# Altium PCB РАЗВОДКА 2.PcbDoc (part 1 of 2)
Units mm, origin at the board's own origin, x right, y up, seen from the top; angles counter-clockwise.
Board outline 81.25 x 50.02 mm, 2 copper layers (Top Layer, Bottom Layer); 71 components, 46 nets, 302 pads, 66 vias.
Unrouted connection lines stored in the file: 1.
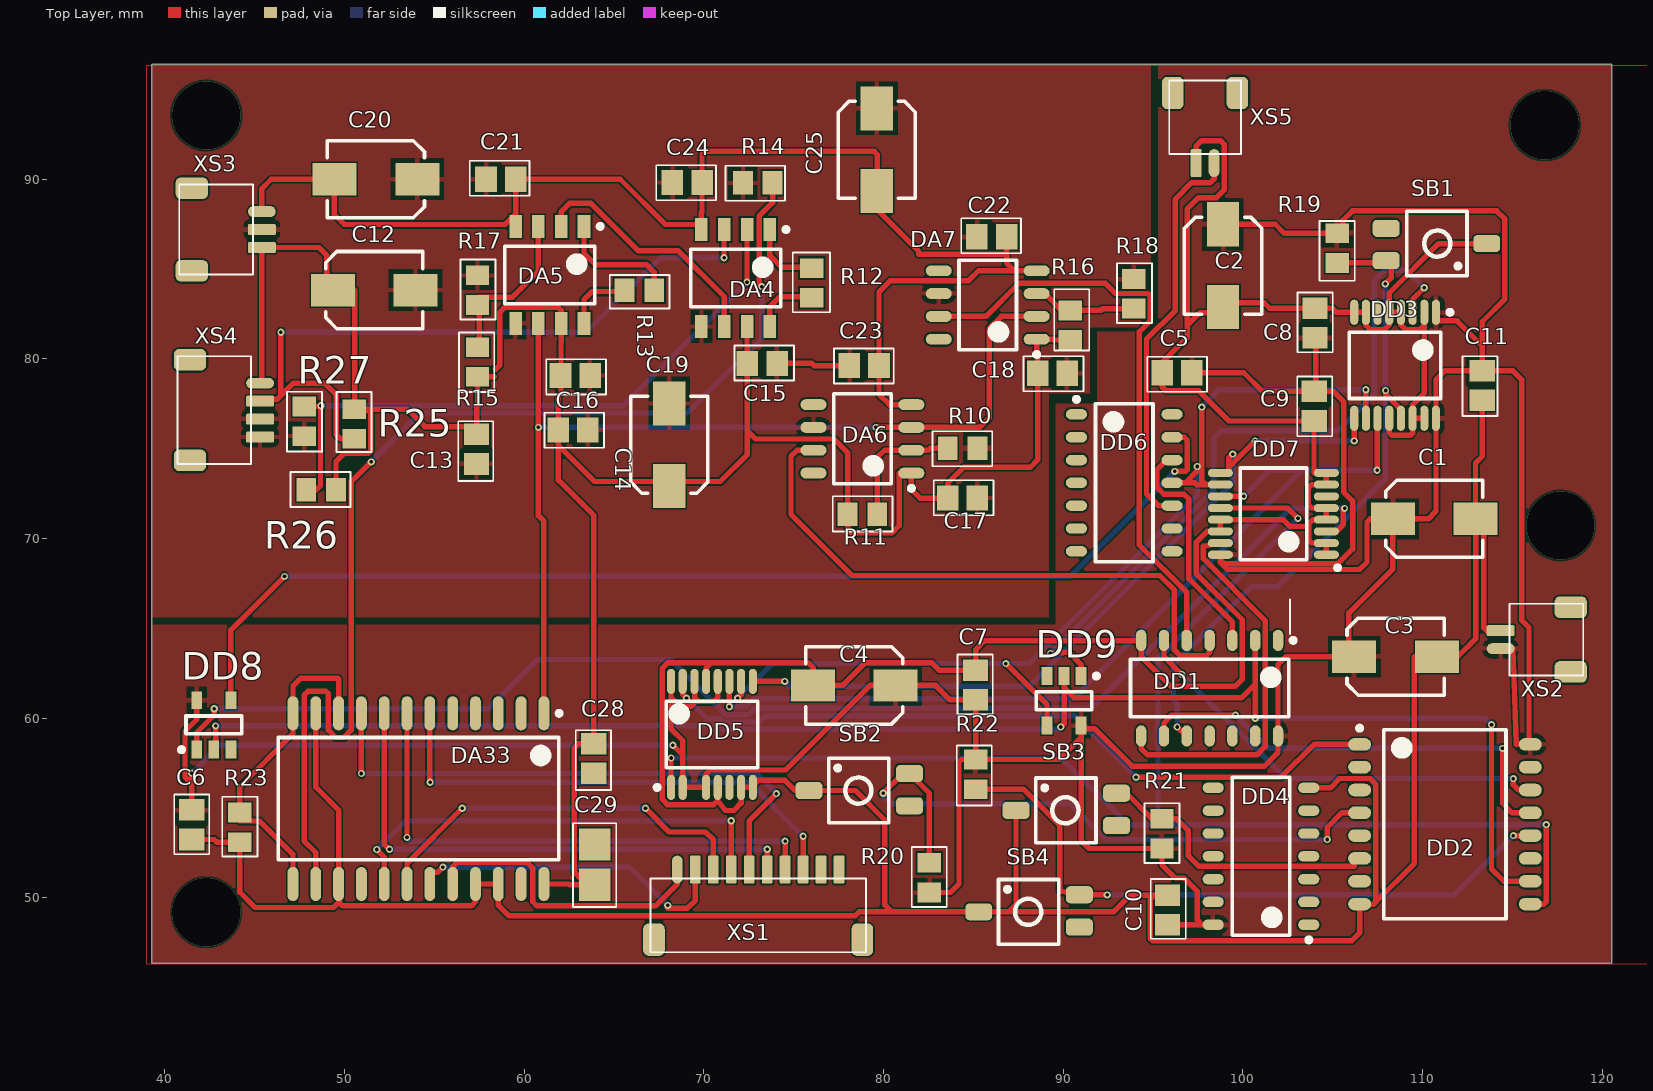
[diagram p0: Top Layer view]
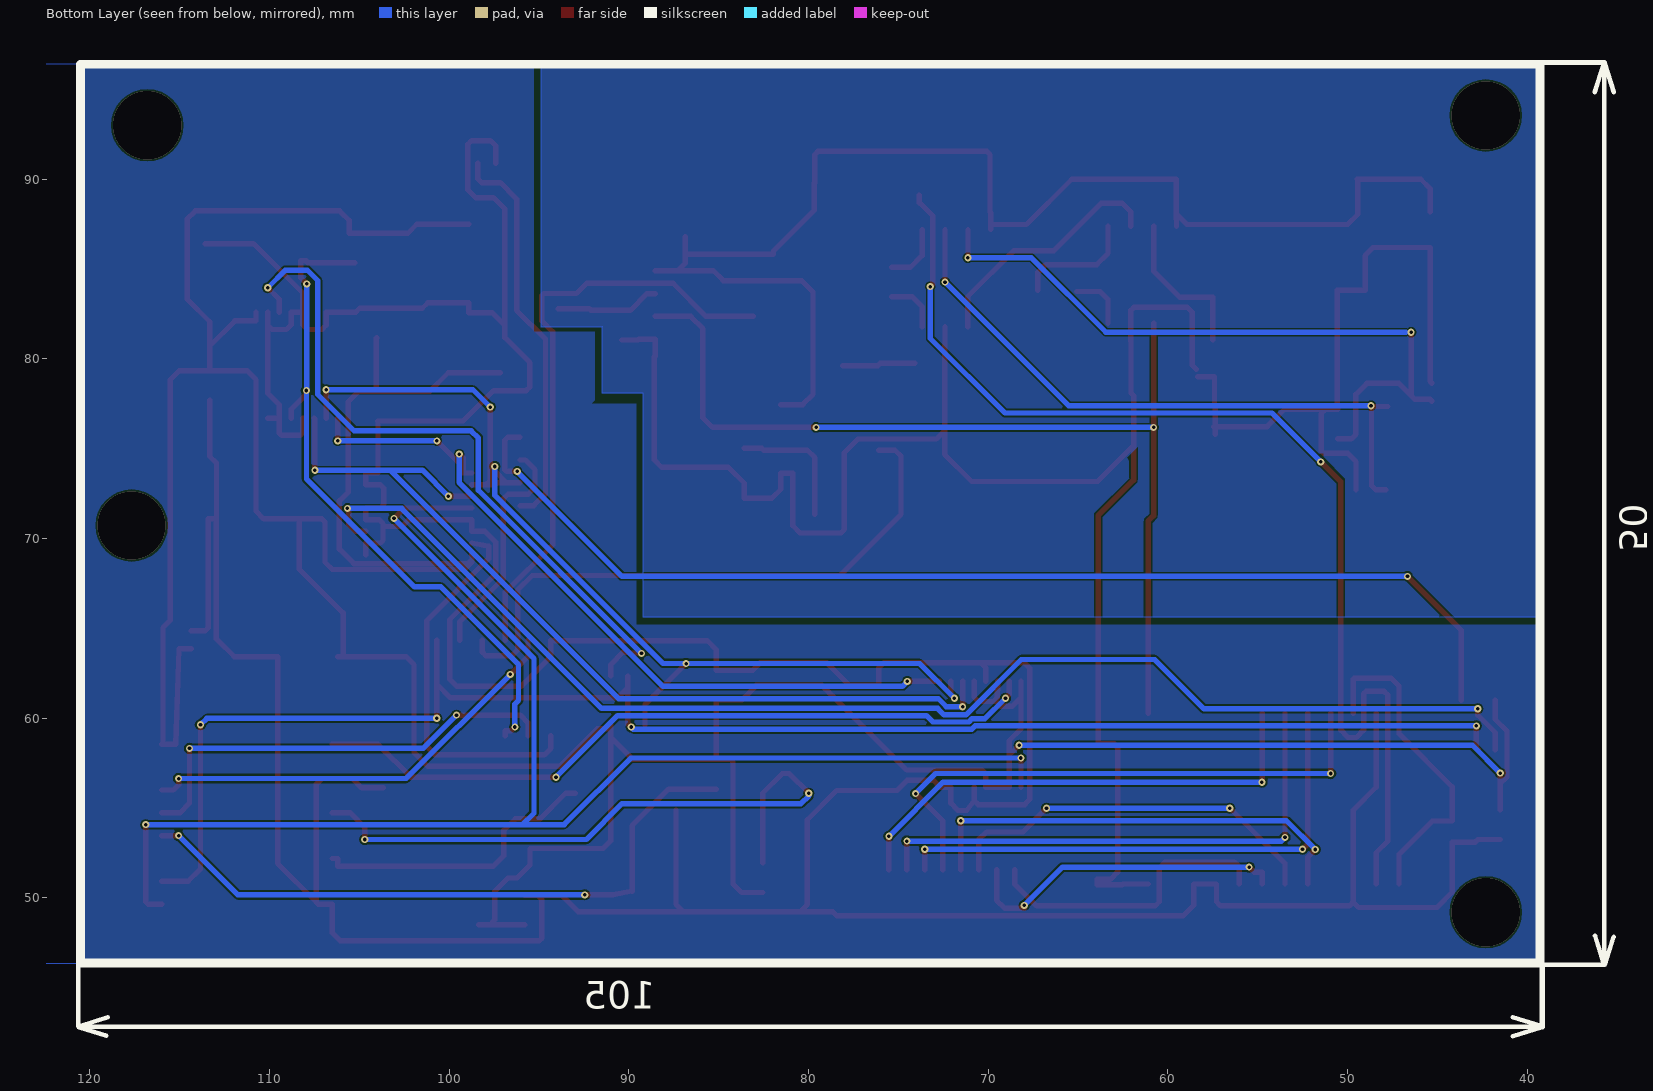
[diagram p1: Bottom Layer view, seen from below]
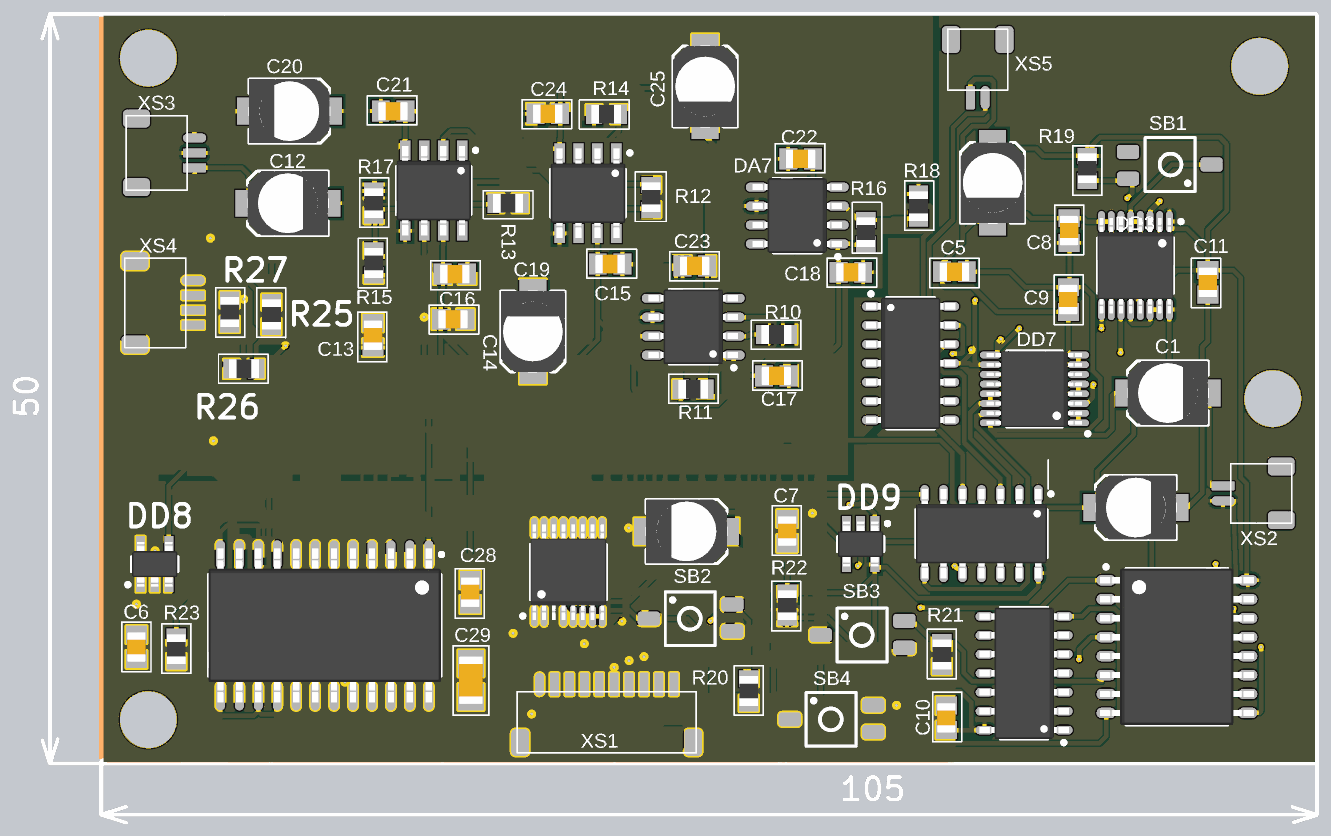
[diagram p3: 3D render of the assembled board from above, using the file's embedded part models]

## Layer stack, top to bottom
Top Solder: solder mask 0.0102, Solder Resist, Dk 3.5
Top Layer: signal copper 0.0356
Dielectric 1: dielectric 0.32, FR-4, Dk 4.8
Bottom Layer: signal copper 0.0356
Bottom Solder: solder mask 0.0102, Solder Resist, Dk 3.5

## Board outline
39.275,46.375 39.275,96.4 120.525,96.4 120.525,46.375

## Design rules (kind name [scope] priority, off if disabled: settings)
Clearance [All] p1: gap=0.1 ignorepadtopadclearanceinfootprint=FALSE except(0: Arc-Hole Track-Hole SMDPad-Hole THPad-Hole Via-Hole Fill-Hole Poly-Hole Region-Hole Text-Hole)
MinimumAnnularRing MinimumAnnularRing_1 [All] p1: minimumring=0.254
MinimumAnnularRing [All] p2: minimumring=0.254
PolygonConnect [All] p1: connectstyle=Relief reliefconductorwidth=0.254 reliefentries=4 polygonreliefangle="90 Angle" airgapwidth=0.254
RoutingVias [All] p1: holewidth=0.2 width=0.4 viastyle="Through Hole" minholewidth=0.2 minwidth=0.4 maxholewidth=0.2 maxwidth=0.4
SolderMaskExpansion [All] p1: expansion=0.102 istentingtop=FALSE
Width [All] p1: maxlimit=1 minlimit=0.1 preferedwidth=0.3
30 further rules are at their usual default settings.

## Classes and differential pairs
component class "Схема принципиальная111": C5 C6 C7 C8 C9 C10 C11 C13 C14 C15 C16 C17 C18 C21 C22 C23 C24 C28 C29 DA4 DA5 DA6 DA7 DA33 DD1 DD2 DD3 DD4 DD5 DD6 DD7 DD8 DD9 R10 R11 R12 R13 R14 R15 R16 R17 R18 R19 R20 R21 R22 R23 R25 R26 R27 SB1 SB2 SB3 SB4 XS1 XS2 XS3 XS4 XS5 С1 С2 С3 С4 С12 С19 С20 С25

## Components (designator, comment, footprint, x,y, rotation, side; value= is the part's Value field where it differs from the comment)
C5 "0.1uF" "Кер.ЧИП конд. 0.1 мкФ X7R 50В 10% 0805" 96.338,79.229 r0 top
C6 "0.1uF" "Кер.ЧИП конд. 0.1 мкФ X7R 50В 10% 0805" 41.5,54.075 r90 top
C7 "0.1uF" "Кер.ЧИП конд. 0.1 мкФ X7R 50В 10% 0805" 85.125,61.85 r270 top
C8 "0.1uF" "Кер.ЧИП конд. 0.1 мкФ X7R 50В 10% 0805" 104.025,81.994 r270 top
C9 "0.1uF" "Кер.ЧИП конд. 0.1 мкФ X7R 50В 10% 0805" 103.975,77.369 r90 top
C10 "0.1uF" "Кер.ЧИП конд. 0.1 мкФ X7R 50В 10% 0805" 95.8,49.325 r270 top
C11 "0.1uF" "Кер.ЧИП конд. 0.1 мкФ X7R 50В 10% 0805" 113.325,78.519 r90 top
C13 "0.1uF" "Кер.ЧИП конд. 0.1 мкФ X7R 50В 10% 0805" 57.354,74.975 r90 top
C14 "0.1uF" "Кер.ЧИП конд. 0.1 мкФ X7R 50В 10% 0805" 62.725,76.05 r180 top
C15 "0.1uF" "Кер.ЧИП конд. 0.1 мкФ X7R 50В 10% 0805" 73.25,79.75 r180 top
C16 "0.1uF" "Кер.ЧИП конд. 0.1 мкФ X7R 50В 10% 0805" 62.846,79.071 r180 top
C17 "0.1uF" "Кер.ЧИП конд. 0.1 мкФ X7R 50В 10% 0805" 84.4,72.25 r180 top
C18 "0.1uF" "Кер.ЧИП конд. 0.1 мкФ X7R 50В 10% 0805" 89.4,79.2 r180 top
C21 "0.1uF" "Кер.ЧИП конд. 0.1 мкФ X7R 50В 10% 0805" 58.7,90 r180 top
C22 "0.1uF" "Кер.ЧИП конд. 0.1 мкФ X7R 50В 10% 0805" 86.025,86.8 r180 top
C23 "0.1uF" "Кер.ЧИП конд. 0.1 мкФ X7R 50В 10% 0805" 78.925,79.625 r180 top
C24 "0.1uF" "Кер.ЧИП конд. 0.1 мкФ X7R 50В 10% 0805" 69.075,89.825 r180 top
C28 "0.1uF" "Кер.ЧИП конд. 0.1 мкФ X7R 50В 10% 0805" 63.875,57.75 r90 top
C29 "47uF" "Кер.ЧИП конд. 47 мкФ X5R 20% 10В 1206" 63.925,51.85 r270 top
DA4 "INA118E_BB" "AD620 Инструмент.усилитель" 71.77,84.5 r270 top
DA5 "INA118E_BB_1" "AD620 Инструмент.усилитель" 61.425,84.675 r270 top
DA6 "AD8561" AD8561 78.825,75.55 r180 top
DA7 "AD8561" AD8561 85.8,83 r180 top
DA33 "AD7824" AD7824 54.115,55.525 r270 top
DD1 "И №1 (4 компонента)" 4x2И 98.15,61.675 r270 top
DD2 "НЕ №3 (4 компонента)" CD4044B 111.25,54.1 r0 top
DD3 "Мультиплексор" Мультиплексор#1 108.475,79.644 r270 top
DD4 "И №2 (2 компонента)" 4x2И 101.01,52.315 r180 top
DD5 "Мультиплексор" Мультиплексор#2 70.45,59.1 r90 top
DD6 "3И №1" 4x2И 93.4,73.1 r0 top
DD7 "Мультиплексор" Мультиплексор#1 101.7,71.375 r180 top
DD8 "ИЛИ №1 (1 компонент)" "ОУ для источника тока" 42.725,59.625 r90 top
DD9 "ИЛИ №1 (1 компонент)" "ОУ для источника тока" 90.05,60.975 r270 top
R10 "1.5k" "0.125Вт 0805 15Ом, 5%, Чип резистор (SMD)" 84.4,75.025 r180 top
R11 "8.2k" "0.125Вт 0805 82Ом, 5%, Чип резистор (SMD)" 78.825,71.35 r180 top
R12 "200k" "0.125Вт 0805 200 кОм, 5%, Чип резистор (SMD)" 76.004,84.225 r90 top
R13 "160k" "0.125Вт 0805 160 кОм, 5%, Чип резистор (SMD)" 66.409,83.825 r0 top
R14 "51k" "0.125Вт 0805 51 кОм, 5%, Чип резистор (SMD)" 73,89.8 r0 top
R15 "7.5k" "0.125Вт 0805 75Ом, 5%, Чип резистор (SMD)" 57.404,79.825 r90 top
R16 "1k" "0.125Вт 0805 91Ом, 5%, Чип резистор (SMD)" 90.4,81.875 r90 top
R17 "2.2k" "0.125Вт 0805 22Ом, 5%, Чип резистор (SMD)" 57.404,83.825 r270 top
R18 "56" "0.125Вт 0805 5.1Ом, 5%, Чип резистор (SMD)" 93.925,83.625 r270 top
R19 "10k" "0.125Вт 0805 3 кОм, 5%, Чип резистор (SMD)" 105.25,86.169 r90 top
R20 "10k" "0.125Вт 0805 3 кОм, 5%, Чип резистор (SMD)" 82.55,51.125 r270 top
R21 "10k" "0.125Вт 0805 3 кОм, 5%, Чип резистор (SMD)" 95.5,53.575 r270 top
R22 "10k" "0.125Вт 0805 3 кОм, 5%, Чип резистор (SMD)" 85.125,56.875 r90 top
R23 "0" "0.125Вт 0805 82Ом, 5%, Чип резистор (SMD)" 44.175,53.925 r90 top
R25 "0.125Вт 0805 15Ом, 5%, Чип резистор (SMD)_2_1" "0.125Вт 0805 15Ом, 5%, Чип резистор (SMD)" 50.55,76.375 r90 top
R26 "0.125Вт 0805 15Ом, 5%, Чип резистор (SMD)_2_1" "0.125Вт 0805 15Ом, 5%, Чип резистор (SMD)" 48.7,72.725 r0 top
R27 "0.125Вт 0805 15Ом, 5%, Чип резистор (SMD)_2_1" "0.125Вт 0805 15Ом, 5%, Чип резистор (SMD)" 47.75,76.525 r90 top
SB1 "Выключатель кнопочный с замыкающим контактом" "Выключатель кнопочный ese21x" 110.825,86.419 r180 top
SB2 "Выключатель кнопочный с замыкающим контактом" "Выключатель кнопочный ese21x" 78.6,55.975 r0 top
SB3 "Выключатель кнопочный с замыкающим контактом" "Выключатель кнопочный ese21x" 90.125,54.875 r0 top
SB4 "Выключатель кнопочный с замыкающим контактом" "Выключатель кнопочный ese21x" 88.05,49.225 r0 top
XS1 "XS 10Pin" CI1108M1H 67.025,49.375 r0 top
XS2 "XS 2Pin (D)" "CI1102M1H  (F)" 116.55,62.375 r90 top
XS3 "XS 3Pin (A)" "CI1108M1H - duplicate" 43.2,89.7 r270 top
XS4 "XS Датчик" CI1102M1H 43.1,80.15 r270 top
XS5 "XS 2Pin_1" "CI1102M1H  (F)" 99.9,93.1 r180 top
ZBOAS131890726 "Comment" "BOASVIEWdrill:Таблица отверстий:0:0:0:0" 33.5,2304.45 r0 top
ZBOAS159094484 "Comment" "BOASVIEWdrilldrawing:Вид DrillDrawing:2:0:0:1" 40.4,2399.9 r0 top
ZBOAS163692688 "Comment" "BOASVIEWside:Вид платы сверху:2:0:0:0" 41.575,2354.3 r0 top
ZBOAS1866194480 "Comment" "BOASVIEWassembly:Вид спереди для сборочного:2:1:0:101" 474,2399.8 r0 top
С1 "1uF" "ECAP SMD, 1 мкФ, 50В, Конденсатор электролитический алюминиевый SMD" 110.65,71.1 r0 top
С2 "1uF" "ECAP SMD, 1 мкФ, 50В, Конденсатор электролитический алюминиевый SMD" 98.9,85.194 r270 top
С3 "1uF" "ECAP SMD, 1 мкФ, 50В, Конденсатор электролитический алюминиевый SMD" 108.5,63.425 r0 top
С4 "1uF" "ECAP SMD, 1 мкФ, 50В, Конденсатор электролитический алюминиевый SMD" 78.375,61.825 r180 top
С12 "1uF" "ECAP SMD, 1 мкФ, 50В, Конденсатор электролитический алюминиевый SMD" 51.65,83.825 r0 top
С19 "1uF" "ECAP SMD, 1 мкФ, 50В, Конденсатор электролитический алюминиевый SMD" 68.075,75.225 r90 top
С20 "1uF" "ECAP SMD, 1 мкФ, 50В, Конденсатор электролитический алюминиевый SMD" 51.75,90 r180 top
С25 "1uF" "ECAP SMD, 1 мкФ, 50В, Конденсатор электролитический алюминиевый SMD" 79.625,91.65 r270 top

## Footprints (in the part's own frame and the unit in brackets; to place one, negate y for a bottom-side part, rotate by r counter-clockwise, add the part's x,y. Pads: shape width x height; smd on the part's side, far side on the other; paste and mask are expansions set on the pad)
"0.125Вт 0805 3 кОм, 5%, Чип резистор (SMD)" [mm]
  rect 1.1x1.3 smd: 1(-0.825,0) 2(0.825,0)
  body extent -1,-0.63 1,0.63, height 0.5
"0.125Вт 0805 5.1Ом, 5%, Чип резистор (SMD)" [mm]
  rect 1.1x1.3 smd: 1(-0.825,0) 2(0.825,0)
  body extent -1,-0.63 1,0.63, height 0.5
"0.125Вт 0805 15Ом, 5%, Чип резистор (SMD)" [mm]
  rect 1.1x1.3 smd: 1(-0.825,0) 2(0.825,0)
  body extent -1,-0.63 1,0.63, height 0.5
"0.125Вт 0805 22Ом, 5%, Чип резистор (SMD)" [mm]
  rect 1.1x1.3 smd: 1(-0.825,0) 2(0.825,0)
  body extent -1,-0.63 1,0.63, height 0.5
"0.125Вт 0805 51 кОм, 5%, Чип резистор (SMD)" [mm]
  rect 1.1x1.3 smd: 1(-0.825,0) 2(0.825,0)
  body extent -1,-0.63 1,0.63, height 0.5
"0.125Вт 0805 75Ом, 5%, Чип резистор (SMD)" [mm]
  rect 1.1x1.3 smd: 1(-0.825,0) 2(0.825,0)
  body extent -1,-0.63 1,0.63, height 0.5
"0.125Вт 0805 82Ом, 5%, Чип резистор (SMD)" [mm]
  rect 1.1x1.3 smd: 1(-0.825,0) 2(0.825,0)
  body extent -1,-0.63 1,0.63, height 0.5
"0.125Вт 0805 91Ом, 5%, Чип резистор (SMD)" [mm]
  rect 1.1x1.3 smd: 1(-0.825,0) 2(0.825,0)
  body extent -1,-0.63 1,0.63, height 0.5
"0.125Вт 0805 160 кОм, 5%, Чип резистор (SMD)" [mm]
  rect 1.1x1.3 smd: 1(-0.825,0) 2(0.825,0)
  body extent -1,-0.63 1,0.63, height 0.5
"0.125Вт 0805 200 кОм, 5%, Чип резистор (SMD)" [mm]
  rect 1.1x1.3 smd: 1(-0.825,0) 2(0.825,0)
  body extent -1,-0.63 1,0.63, height 0.5
4x2И [mm] "MC74ACT08DG, Логический элемент И, 74ACT08, 2 входа, 24мА, 4.5В до 5.5В, SOIC-14"
  oval 1.18x0.58 smd: 1(-2.66,3.81) 2(-2.66,2.54) 3(-2.66,1.27) 4(-2.66,0) 5(-2.66,-1.27) 6(-2.66,-2.54) 7(-2.66,-3.81) 8(2.66,-3.81) 9(2.66,-2.54) 10(2.66,-1.27) 11(2.66,0) 12(2.66,1.27) 13(2.66,2.54) 14(2.66,3.81)
  silkscreen extent -2.78,-4.4 1.6,4.78, body extent -3,-4.4 3,4.4, height 1.75
"AD620 Инструмент.усилитель" [mm] "SOIC, 8-Leads, Body 4,90x3,90mm, Pitch 1,27mm, IPC Medium Density"
  rect 1.28x0.7 smd: 1(-2.7,1.905) 2(-2.7,0.635) 3(-2.7,-0.635) 4(-2.7,-1.905) 5(2.7,-1.905) 6(2.7,-0.635) 7(2.7,0.635) 8(2.7,1.905)
  silkscreen extent -2.82,-2.5 1.6,2.93, body extent -3,-2.5 3,2.5, height 1.75
AD7824 [mm] "SOIC, 24-Leads, Body 15,40x7,50mm, Pitch 1,27mm, IPC Medium Density"
  oval 1.9x0.6 smd: 1(-4.75,6.985) 2(-4.75,5.715) 3(-4.75,4.445) 4(-4.75,3.175) 5(-4.75,1.905) 6(-4.75,0.635) 7(-4.75,-0.635) 8(-4.75,-1.905) 9(-4.75,-3.175) 10(-4.75,-4.445) 11(-4.75,-5.715) 12(-4.75,-6.985) 13(4.75,-6.985) 14(4.75,-5.715) 15(4.75,-4.445) 16(4.75,-3.175) 17(4.75,-1.905) 18(4.75,-0.635) 19(4.75,0.635) 20(4.75,1.905) 21(4.75,3.175) 22(4.75,4.445) 23(4.75,5.715) 24(4.75,6.985)
  silkscreen extent -4.87,-7.8 3.4,7.96, body extent -5.16,-7.8 5.16,7.8, height 2.65
AD8561 [mm] "SOIC, 8-Leads, Body 4,90x3,90mm, Pitch 1,27mm, IPC Medium Density"
  oval 1.45x0.6 smd: 1(-2.725,1.905) 2(-2.725,0.635) 3(-2.725,-0.635) 4(-2.725,-1.905) 5(2.725,-1.905) 6(2.725,-0.635) 7(2.725,0.635) 8(2.725,1.905)
  silkscreen extent -2.85,-2.5 1.6,2.88, body extent -3,-2.5 3,2.5, height 1.75
"BOASVIEWassembly:Вид спереди для сборочного:2:1:0:101" [mm]
"BOASVIEWdrill:Таблица отверстий:0:0:0:0" [mm]
"BOASVIEWdrilldrawing:Вид DrillDrawing:2:0:0:1" [mm]
"BOASVIEWside:Вид платы сверху:2:0:0:0" [mm]
CD4044B [mm] "SOIC, 16-Leads, Body 10,30x7,50mm, Pitch 1,27mm, IPC Medium Density"
  oval 1.28x0.7 smd: 1(-4.75,4.445) 2(-4.75,3.175) 3(-4.75,1.905) 4(-4.75,0.635) 5(-4.75,-0.635) 6(-4.75,-1.905) 7(-4.75,-3.175) 8(-4.75,-4.445) 9(4.75,-4.445) 10(4.75,-3.175) 11(4.75,-1.905) 12(4.75,-0.635) 13(4.75,0.635) 14(4.75,1.905) 15(4.75,3.175) 16(4.75,4.445)
  silkscreen extent -4.87,-5.25 3.4,5.47, body extent -5.16,-5.25 5.16,5.25, height 2.65
CI1102M1H [mm]
  oval 0.6x1.55 smd: 1(1.5,2.2)
  rrect20% 0.6x1.55 smd: 2(2.5,2.2) 3(3.5,2.2) 4(4.5,2.2)
  rrect50% 1.2x1.8 smd: 5(0.2,-1.7) 6(5.8,-1.7)
  silkscreen extent 0,-2.4 6,1.7
"CI1102M1H  (F)" [mm]
  oval 0.6x1.55 smd: 1(1.5,2.2)
  rrect20% 0.6x1.55 smd: 2(2.5,2.2)
  rrect50% 1.2x1.8 smd: 3(0.2,-1.7) 4(3.8,-1.7)
  silkscreen extent 0,-2.4 4,1.7
CI1108M1H [mm]
  oval 0.6x1.55 smd: 1(1.5,2.2)
  rrect20% 0.6x1.55 smd: 2(2.5,2.2) 3(3.5,2.2) 4(4.5,2.2) 5(5.5,2.2) 6(6.5,2.2) 7(7.5,2.2) 8(8.5,2.2) 9(9.5,2.2) 10(10.5,2.2)
  rrect50% 1.2x1.8 smd: 11(0.2,-1.7) 12(11.8,-1.7)
  silkscreen extent 0,-2.4 12,1.7
"CI1108M1H - duplicate" [mm]
  rrect20% 0.6x1.55 smd: 1(3.5,2.2) 2(2.5,2.2)
  oval 0.6x1.55 smd: 3(1.5,2.2)
  rrect50% 1.2x1.8 smd: 4(0.2,-1.7) 5(4.8,-1.7)
  silkscreen extent 0,-2.4 5,1.7
"ECAP SMD, 1 мкФ, 50В, Конденсатор электролитический алюминиевый SMD" [mm] "ECAP SMD, 1 мкФ, 50В, Конденсатор электролитический алюминиевый SMD"
  rect 2.45x1.8 smd: 1(-2.3,0) 2(2.3,0)
  silkscreen extent -2.7,-2.15 2.7,2.15, body extent -2.75,-2.15 2.75,2.15, height 5.4
"Выключатель кнопочный ese21x" [mm] "SOTFL, 3-Leads, Body 3,62x1,60mm, Pitch 1,50mm, IPC Medium Density"
  rrect50% 1.5x0.95 smd: 1(-2.75,0) 2(2.85,0.95) 3(2.85,-0.85)
  silkscreen extent -1.65,-1.8 1.7,1.8
"Кер.ЧИП конд. 0.1 мкФ X7R 50В 10% 0805" [mm]
  rect 1.2x1.4 smd: 1(-0.825,0) 2(0.825,0)
  body extent -1,-0.63 1,0.63, height 1.3
"Кер.ЧИП конд. 47 мкФ X5R 20% 10В 1206" [mm] "Кер.ЧИП конд. 47 мкФ X5R 20% 10В 1206"
  rect 1.8x1.75 smd: 1(-1.125,0) 2(1.125,0)
  body extent -1.6,-0.8 1.6,0.8, height 1.5
Мультиплексор#1 [mm] "TSOP, 16-Leads, Body 5,00x4,40mm, Pitch 0,65mm, IPC Medium Density"
  oval 1.4x0.45 smd: 1(-2.95,2.275) 2(-2.95,1.625) 3(-2.95,0.975) 4(-2.95,0.325) 5(-2.95,-0.325) 6(-2.95,-0.975) 7(-2.95,-1.625) 8(-2.95,-2.275) 9(2.95,-2.275) 10(2.95,-1.625) 11(2.95,-0.975) 12(2.95,-0.325) 13(2.95,0.325) 14(2.95,0.975) 15(2.95,1.625) 16(2.95,2.275)
  silkscreen extent -3.07,-2.55 1.85,3.17, body extent -3.2,-2.55 3.2,2.55, height 0.95
Мультиплексор#2 [mm] "TSOP, 16-Leads, Body 5,00x4,40mm, Pitch 0,65mm, IPC Medium Density"
  oval 1.4x0.45 smd: 1(-2.95,2.275) 2(-2.95,1.625) 4(-2.95,0.325) 5(-2.95,-0.325) 6(-2.95,-0.975) 7(-2.95,-1.625) 8(-2.95,-2.275) 9(2.95,-2.275) 10(2.95,-1.625) 11(2.95,-0.975) 12(2.95,-0.325) 13(2.95,0.325) 14(2.95,0.975) 15(2.95,1.625) 16(2.95,2.275)
  silkscreen extent -3.07,-2.55 1.85,3.17, body extent -3.2,-2.55 3.2,2.55, height 0.95
"ОУ для источника тока" [mm] "SOT23, 5-Leads, Body 2,90x2,80mm, Pitch 0,95mm, IPC Medium Density"
  rect 1x0.6 smd: 1(-1.375,0.95) 2(-1.375,0) 3(-1.375,-0.95) 4(1.375,-0.95) 5(1.375,0.95)
  silkscreen extent -1.5,-1.55 0.5,1.92, body extent -1.5,-1.53 1.5,1.53, height 1.45

## Part data
C5 C6 C7 C8 C9 C10 C11 C13 C14 C15 C16 C17 C18 C21 C22 C23 C24 C28: library part "Кер.ЧИП конд. 0.1 мкФ X7R 50В 10% 0805", "Кер.ЧИП конд. 0.1 мкФ X7R 50В 10% 0805"
C29: library part "Кер.ЧИП конд. 47 мкФ X5R 20% 10В 1206", "Кер.ЧИП конд. 47 мкФ X5R 20% 10В 1206"
DD3 DD5 DD7: "74HC40510"
R10: library part "0.125Вт 0805 15Ом, 5%, Чип резистор (SMD)_2_1", "0.125Вт 0805 15Ом, 5%, Чип резистор (SMD)"
R11 R23: library part "0.125Вт 0805 82Ом, 5%, Чип резистор (SMD)_2_2", "0.125Вт 0805 82Ом, 5%, Чип резистор (SMD)"
R12: library part "0.125Вт 0805 200 кОм, 5%, Чип резистор (SMD)", "0.125Вт 0805 200 кОм, 5%, Чип резистор (SMD)"
R13: library part "0.125Вт 0805 160 кОм, 5%, Чип резистор (SMD)", "0.125Вт 0805 160 кОм, 5%, Чип резистор (SMD)"
R14: library part "0.125Вт 0805 51 кОм, 5%, Чип резистор (SMD)", "0.125Вт 0805 51 кОм, 5%, Чип резистор (SMD)"
R15: library part "0.125Вт 0805 75Ом, 5%, Чип резистор (SMD)", "0.125Вт 0805 75Ом, 5%, Чип резистор (SMD)"
R16: library part "0.125Вт 0805 91кОм, 5%, Чип резистор (SMD)_1", "0.125Вт 0805 91Ом, 5%, Чип резистор (SMD)"
R17: library part "0.125Вт 0805 22Ом, 5%, Чип резистор (SMD)", "0.125Вт 0805 22Ом, 5%, Чип резистор (SMD)"
R18: library part "0.125Вт 0805 5.1Ом, 5%, Чип резистор (SMD)_2", "0.125Вт 0805 5.1Ом, 5%, Чип резистор (SMD)"
R19 R20 R21 R22: library part "0.125Вт 0805 5кОм, 5%, Чип резистор (SMD)", "0.125Вт 0805 5кОм, 5%, Чип резистор (SMD)"
R25 R26 R27: "0.125Вт 0805 15Ом, 5%, Чип резистор (SMD)"
С1 С2 С3 С4 С12 С19 С20 С25: library part "ECAP SMD, 1 мкФ, 50В, Конденсатор электролитический алюминиевый SMD", "ECAP SMD, 1 мкФ, 50В, Конденсатор электролитический алюминиевый SMD"

## Via types
v1: diameter 0.4, hole 0.2, Top Layer to Bottom Layer, 62 vias
v2: diameter 3.8, hole 3.8, Top Layer to Bottom Layer, 4 vias

## Nets (pads, with @x,y where several pads share a name; then routed paths per layer and width w, separated by ;. In a path a pad name is that pad's centre, name@x,y a point inside that pad or via, vN(x,y) a via of type N, cw(c..) or ccw(c..) an arc to the next point about the centre after c; other vN are vias at no path point)
"+5V A": C13.2 C14.2 C15.2 C16.2 C17.2 C18.2 C28.2 C29.2 DA4.7 DA5.7 DA6.1 DA7.1 DA33.24 R11.2 R15.1 R16.1 R25.2 R26.2 XS3.1 XS4.1 С12.1 С19.1 | length 137.9
  Top Layer w0.3: XS4.1@45.3,78.65 45.4,78.75 XS3.1@45.4,86.2 48.572,86.2 49.022,85.75 49.022,83.825 С12.1@49.35,83.825 50.571,83.825 R25.2@50.571,77.2 ; R26.2@49.525,72.725 49.525,74.288 49.987,74.75 51.331,74.75 51.46,74.879 51.46,76.946 51.206,77.2 ; R25.2@50.55,77.2 R25.2@50.571,77.2 ; C13.2@57.354,75.8 57.354,77.35 57.404,77.4 R15.1@57.404,79 58.323,79 ; C13.2@57.45,76.225 54.467,76.225 53.492,77.2 51.206,77.2 ; 58.419,79.425 58.649,79.654 58.649,82.601 58.928,82.88 61.882,82.88 62.06,82.702 DA5.7@62.06,81.975 62.06,80.985 62.05,80.975 62.05,80.025 62.05,78.103 61.9,77.953 C14.2@61.9,76.05 61.9,75.184 ; DA33.24@61.1,50.775 62.484,50.775 62.534,50.725 C29.2@63.925,50.725 63.925,51.029 63.195,51.029 62.789,51.435 62.789,58.372 62.992,58.575 C28.2@63.875,58.575 63.875,71.279 61.9,73.254 61.9,75.184 ; DA4.7@72.405,81.8 72.405,80.767 72.425,80.747 C15.2@72.425,79.75 72.425,75.997 ; DA6.1@81.55,73.645 DA6.1@81.534,73.645 ; R16.1@90.4,81.05 89.478,81.05 89.433,81.095 DA7.1@88.525,81.095 88.525,80.162 88.575,80.112 C18.2@88.575,79.2 88.575,74.371 88.169,73.965 84.455,73.965 83.575,73.085 C17.2@83.575,72.25 82.03,72.25 81.534,72.746 DA6.1@81.534,73.645 ; R25.2@50.571,77.2 51.206,77.2 ; 61.9,75.184 63.909,73.175 68.075,73.175 70.914,73.175 72.425,74.686 72.425,75.997 ; 72.425,75.997 72.882,75.54 77.238,75.54 78,74.778 R11.2@78,71.35 78,70.51 78.203,70.307 80.467,70.307 80.874,70.714 80.874,73.645 DA6.1@81.534,73.645
"+5V D": C5.2 C6.2 C7.2 C8.2 C9.2 C10.2 C11.2 DD1.14 DD2.16 DD3.1 DD3.16 DD4.14 DD5.2 DD5.4 DD5.12 DD5.14 DD5.16 DD7.16 DD8.5 DD9.5 R19.2 R20.2 R21.2 R22.2 XS2.1 С1.1 С2.1 С3.1 С4.1 | length 247.6
  Top Layer w0.3: C6.2@41.5,54.9 41.5,56.363 ; v1(41.5,56.947) 41.5,56.363 ; DD8.5@41.775,61 41.775,59.936 41.123,59.284 41.123,56.74 41.5,56.363 ; DD5.16@68.175,62.05 68.175,61.162 ; v1(68.275,58.496) 68.825,57.946 ; DD5.14@69.475,62.05 69.475,61.564 69.497,61.564 69.497,61.131 69.628,61 ; DD5.12@70.775,62.05 70.775,61.163 70.542,60.93 69.698,60.93 69.628,61 ; R20.2@82.55,50.3 83.718,50.3 84.201,50.783 84.201,57.573 84.328,57.7 R22.2@85.125,57.7 ; DD9.5@91,59.6 DD9.5@91,59.411 ; C10.2@95.8,48.5 97.053,48.5 97.058,48.505 97.732,48.505 ; C5.2@97.163,79.229 100.051,79.229 101.086,78.194 C9.2@103.975,78.194 ; DD4.14@98.35,48.505 97.732,48.505 ; DD7.16@98.75,69.1 98.73,69.1 98.73,68.834 ; С2.1@98.9,87.494 101.803,87.494 102.303,86.994 R19.2@105.25,86.994 105.562,86.994 105.562,87.706 106.096,88.24 114.122,88.24 114.579,87.782 114.579,83.322 113.325,82.067 113.325,80.721 ; C8.2@104.025,81.169 104.052,81.142 104.052,78.271 C9.2@103.975,78.194 ; С3.1@106.2,63.425 С3.1@105.9,63.425 ; DD3.1@110.75,82.594 110.75,82.118 111.928,82.118 113.325,80.721 ; XS2.1@114.35,63.875 115.037,63.875 115.214,58.545 DD2.16@115.926,58.545 ; DD2.16@116,58.545 DD2.16@115.926,58.545 ; 68.175,61.162 68.175,59.4 68.825,58.75 68.825,57.946 ; 68.175,61.162 68.674,60.662 69.291,60.662 69.628,61 ; 68.825,57.946 DD5.2@68.825,56.15 DD5.4@70.125,56.15 70.125,56.896 70.349,57.12 74.543,57.12 79.248,61.825 С4.1@80.675,61.825 82.904,61.825 83.704,61.025 C7.2@85.125,61.025 R22.2@85.125,57.7 ; R22.2@85.125,57.7 89.772,57.7 91,58.928 ; 91,58.928 DD9.5@91,59.411 ; 91,58.928 91,53.19 91.44,52.75 R21.2@95.5,52.75 95.5,51.841 96.237,51.105 96.723,51.105 97.469,50.359 97.469,48.768 97.732,48.505 ; DD9.5@91,59.411 91.77,59.411 93.853,57.328 101.194,57.328 101.96,58.094 DD1.14@101.96,59.015 101.96,62.992 102.393,63.425 С3.1@105.9,63.425 ; 98.73,68.834 98.806,68.758 98.958,68.605 105.308,68.605 106.114,69.411 106.114,72.094 105.613,72.595 105.613,77.622 105.041,78.194 C9.2@103.975,78.194 ; 98.73,68.834 98.73,68.682 98.882,68.529 99.136,68.275 106.502,68.275 106.909,68.682 106.909,70.922 107.086,71.1 С1.1@108.35,71.1 ; С3.1@105.9,63.425 105.9,65.867 108.35,68.317 С1.1@108.35,71.1 ; С1.1@108.35,71.1 110.324,71.1 110.75,71.526 DD3.16@110.75,76.694 110.75,78.842 111.253,79.344 C11.2@113.325,79.344 ; C11.2@113.325,79.344 115.017,79.344 115.519,78.842 115.519,65.456 115.926,65.049 DD2.16@115.926,58.545 ; C11.2@113.325,79.344 113.325,80.721
  Bottom Layer w0.3: v1(41.5,56.947) 43.049,58.496 v1(68.275,58.496)
"-5V A": C21.1 C22.1 C23.1 C24.1 DA4.4 DA5.4 DA6.4 DA7.4 XS3.3 С20.2 С25.2 | length 76.7
  Top Layer w0.3: XS3.3@45.4,88.2 45.39,88.2 45.39,89.467 45.923,90 С20.2@49.428,90 ; С20.2@49.45,90 С20.2@49.428,90 ; DA5.4@59.52,87.375 59.525,88.075 ; DA4.4@69.865,87.2 DA4.4@69.865,87.478 ; С25.2@79.65,89.775 79.65,91.374 79.474,91.55 70.076,91.55 69.9,91.374 69.9,88.173 69.865,88.138 DA4.4@69.865,87.478 ; С25.2@79.674,89.775 79.674,88.276 81.948,86.002 81.948,85.827 86.723,85.827 86.85,85.954 ; DA6.4@81.55,77.455 80.324,77.455 79.75,78.029 C23.1@79.75,79.625 79.75,83.718 80.385,84.353 84.742,84.353 85.293,84.905 87.289,84.905 ; C22.1@86.85,86.8 86.85,85.954 ; DA7.4@88.525,84.905 87.289,84.905 ; С20.2@49.428,90 49.428,88.036 49.987,87.478 58.928,87.478 59.318,87.867 59.525,88.075 ; 59.525,88.075 C21.1@59.525,90 65.346,90 67.869,87.478 DA4.4@69.865,87.478 ; 86.85,85.954 86.85,85.827 86.85,85.344 87.289,84.905
A: C13.1 C14.1 C15.1 C16.1 C17.1 C18.1 C21.2 C22.2 C23.2 C24.2 C28.1 C29.1 DA4.5 DA5.5 DA6.6 DA7.6 DA33.10 DA33.12 DA33.13 DA33.16 R10.1 R14.1 R17.1 R18.1 R23.2 R27.1 XS1.9 XS1.10 XS3.2 XS4.3 XS4.4 С12.2 С19.2 С20.1 С25.1 | length 22.8
  Top Layer w0.3: DA33.13@47.13,50.775 47.13,52.426 45.276,54.28 44.175,54.28 R23.2@44.175,54.75 44.175,56.185 47.13,59.14 DA33.12@47.13,60.275 47.13,61.799 47.549,62.218 49.632,62.218 49.67,62.179 DA33.10@49.67,60.275 ; C15.1@74.075,79.75 76.022,79.75 76.147,79.625 C23.2@78.1,79.625
D: C5.1 C6.1 C7.1 C8.1 C9.1 C10.1 C11.1 DA33.11 DA33.15 DA33.21 DA33.22 DD1.7 DD2.8 DD3.2 DD3.4 DD3.5 DD3.7 DD3.8 DD3.12 DD3.14 DD3.15 DD4.7 DD5.5 DD5.7 DD5.8 DD5.13 DD7.1 DD7.2 DD7.4 DD7.5 DD7.7 DD7.8 DD7.13 DD7.14 R23.1 SB1.1 SB2.1 SB3.1 SB4.1 XS2.2 XS5.2 С1.2 С2.2 С3.2 С4.2 | length 301.8
  Top Layer w0.3: C6.1@41.5,53.25 42.748,53.25 42.898,53.1 R23.1@44.175,53.1 44.175,50.313 45.021,49.467 49.378,49.467 49.682,49.772 ; DA33.11@48.4,60.275 48.4,56.159 49.67,54.889 DA33.15@49.67,50.775 ; DD5.13@70.125,62.05 70.125,62.789 70.43,63.094 ; DD5.5@70.775,56.15 70.775,55.423 ; С4.2@76.075,61.825 С4.2@76.098,61.825 ; SB3.1@87.375,54.875 87.376,49.631 86.97,49.225 ; DD1.7@94.34,64.335 DD1.7@94.34,64.313 ; C10.1@95.8,50.15 95.098,50.15 ; XS5.2@97.4,90.9 97.4,91.846 97.705,92.151 98.755,92.151 98.958,91.948 98.958,89.408 98.527,88.976 97.536,88.976 96.901,88.341 96.901,81.864 ; DD4.7@103.67,56.125 104.877,56.125 105.394,56.642 107.086,56.642 107.391,56.337 107.391,49.757 ; C9.1@103.975,76.544 C9.1@103.962,76.544 ; DD7.1@104.65,69.1 DD7.2@104.65,69.75 103.834,69.75 103.683,69.901 103.683,70.67 ; DD2.8@106.5,49.655 DD2.8@106.502,49.655 ; DD3.12@108.15,76.694 108.15,75.895 108.302,75.743 109.322,75.743 109.45,75.871 DD3.14@109.45,76.694 ; DD3.15@110.1,76.694 DD3.14@109.45,76.694 ; DD3.2@110.1,82.594 110.1,81.89 ; C11.1@113.325,77.694 113.325,74.568 112.95,74.193 С1.2@112.95,71.1 С1.2@112.954,71.1 ; SB1.1@113.575,86.419 110.902,86.419 108.15,83.668 DD3.5@108.15,82.594 ; XS2.2@114.35,64.875 113.56,64.875 113.411,65.024 113.411,71.1 С1.2@112.954,71.1 ; DA33.15@49.67,50.775 49.682,49.772 ; DA33.15@49.67,50.775 49.67,49.784 49.682,49.772 ; 49.682,49.772 49.899,49.555 57.061,49.555 57.29,49.784 DA33.21@57.29,50.775 DA33.22@58.56,50.775 58.56,49.581 59.144,48.997 78.41,48.997 78.638,49.225 80.467,49.225 ; 70.43,63.094 75.794,63.094 76.098,62.789 С4.2@76.098,61.825 ; 70.43,63.094 67.996,63.094 67.691,62.789 67.691,55.474 67.97,55.194 70.546,55.194 70.775,55.423 ; 70.775,55.423 71.181,54.864 71.669,54.864 72.075,55.27 DD5.7@72.075,56.15 DD5.8@72.725,56.15 72.725,56.223 73.056,56.554 74.5,56.554 75.079,55.975 SB2.1@75.85,55.975 78.435,55.975 80.061,54.349 80.061,49.631 80.467,49.225 ; С4.2@76.098,61.825 77.724,61.825 78.993,63.094 82.677,63.094 83.096,62.675 C7.1@85.125,62.675 85.125,63.805 85.633,64.313 DD1.7@94.34,64.313 ; 80.467,49.225 SB4.1@85.3,49.225 86.97,49.225 ; 86.97,49.225 92.811,49.225 93.736,50.15 95.098,50.15 ; DD1.7@94.34,64.313 94.34,63.445 96.012,61.773 99.568,61.773 99.974,62.179 99.974,65.481 97.4,68.056 97.4,69.79 98.01,70.4 DD7.14@98.75,70.4 DD7.13@98.75,71.05 102.243,71.05 102.623,70.67 103.683,70.67 ; 95.098,50.15 94.844,49.896 94.844,47.752 94.971,47.625 106.07,47.625 106.502,48.057 DD2.8@106.502,49.655 ; 96.901,81.864 97.612,82.575 98.9,82.575 С2.2@98.9,82.894 98.9,83.126 101.19,83.126 101.497,82.819 C8.1@104.025,82.819 104.978,82.819 105.203,82.594 DD3.8@106.2,82.594 DD3.7@106.85,82.594 106.85,81.872 107.086,81.636 107.899,81.636 108.15,81.886 DD3.5@108.15,82.594 ; 96.901,81.864 96.901,81.178 95.513,79.79 C5.1@95.513,79.229 95.513,78.435 95.716,78.232 97.532,78.232 99.22,76.544 C9.1@103.962,76.544 ; 103.683,70.67 103.683,70.83 103.903,71.05 DD7.4@104.65,71.05 DD7.5@104.65,71.7 103.835,71.7 103.632,71.903 103.632,72.797 103.835,73 DD7.7@104.65,73 DD7.8@104.65,73.65 103.962,73.65 C9.1@103.962,76.544 ; DD2.8@106.502,49.655 107.29,49.655 107.391,49.757 ; 107.391,49.757 109.55,51.916 109.55,63.425 С3.2@110.8,63.425 111.963,63.425 112.954,64.416 С1.2@112.954,71.1 ; DD3.5@108.15,82.594 DD3.4@108.8,82.594 108.8,81.89 109.054,81.636 109.846,81.636 110.1,81.89 ; DD3.14@109.45,76.694 109.45,77.445 110.1,78.095 110.1,81.89
NetDA4_1: DA4.1 R12.2 | length 3.4
  Top Layer w0.3: DA4.1@73.675,87.2 73.675,85.75 74.325,85.1 R12.2@75.375,85.1
NetDA4_2: DA4.2 R26.1 R27.2 | length 35.8
  Top Layer w0.3: R27.2@47.75,77.35 v1@48.565,77.35 ; R26.1@47.875,72.725 48.443,72.725 48.666,72.949 48.666,77.248 48.606,77.308 v1@48.565,77.35 ; v1(48.692,77.394) 48.692,77.35 v1@48.565,77.35 ; v1(72.4,84.275) 72.4,87.195 DA4.2@72.405,87.2
  Bottom Layer w0.3: v1(48.692,77.394) 65.519,77.394 v1(72.4,84.275)
NetDA4_3: DA4.3 R25.1 XS4.2 | length 39.4
  Top Layer w0.3: XS4.2@45.3,77.65 45.413,77.763 46.263,77.763 46.483,77.983 47.138,78.638 48.92,78.638 49.53,78.029 49.53,75.794 49.774,75.55 R25.1@50.55,75.55 ; 46.461,78.006 v1(46.461,81.483) ; v1(71.125,85.625) DA4.3@71.125,87.2
  Bottom Layer w0.3: 46.761,81.483 63.449,81.483 67.591,85.625 v1(71.125,85.625)
NetDA4_6: DA4.6 DA5.2 | length 13.9
  Top Layer w0.3: DA5.2@62.06,87.375 62.06,88.189 62.543,88.671 63.703,88.671 66.345,86.03 68.57,86.03 71.135,83.465 DA4.6@71.135,81.8
NetDA4_8: DA4.8 R12.1 | length 3
  Top Layer w0.3: DA4.8@73.675,81.8 73.675,82.906 74.219,83.45 R12.1@75.375,83.45
NetDA5_1: DA5.1 R13.2 | length 6.8
  Top Layer w0.3: DA5.1@63.33,87.375 63.33,85.875 63.955,85.25 66.8,85.25 67.234,84.816 R13.2@67.234,83.825
NetDA5_3: DA5.3 R15.2 R17.2 | length 8.7
  Top Layer w0.3: R15.2@57.5,81.075 57.5,83.425 59.32,83.425 60.79,84.895 DA5.3@60.79,87.375
NetDA5_6: DA5.6 DA6.3 DA7.2 DA33.1 | length 55
  Top Layer w0.3: DA5.6@60.79,81.975 v1(60.79,76.185) 60.79,71.278 61.1,70.968 DA33.1@61.1,60.275 ; v1(79.578,76.185) DA6.3@81.55,76.185 85.344,76.185 85.877,76.718 85.877,81.686 86.556,82.365 DA7.2@88.525,82.365
  Bottom Layer w0.3: v1(60.79,76.185) v1(79.578,76.185)
NetDA5_8: DA5.8 R13.1 | length 3.3
  Top Layer w0.3: DA5.8@63.33,81.975 63.33,83.312 63.768,83.75 R13.1@65.075,83.75
NetDA6_2: DA6.2 R10.2 R11.1 | length 7.3
  Top Layer w0.3: R11.1@79.65,71.35 79.65,74.504 80.061,74.915 DA6.2@81.55,74.915 82.499,74.915 82.609,75.025 R10.2@83.575,75.025
NetDA6_7: DA6.7 DD1.4 | length 33.9
  Top Layer w0.3: DA6.7@76.1,74.915 75.184,74.915 74.854,74.585 74.854,71.349 78.257,67.945 95.375,67.945 96.19,67.13 96.19,63.805 96.52,63.475 97.942,63.475 98.15,63.682 DD1.4@98.15,64.335
NetDA7_3: DA7.3 R16.2 R18.2 | length 5.8
  Top Layer w0.3: DA7.3@88.525,83.635 88.976,83.635 89.911,82.7 R16.2@90.4,82.7 92.1,82.7 92.2,82.8 R18.2@93.925,82.8
NetDA7_7: DA7.7 DD1.5 | length 33.3
  Top Layer w0.3: DA7.7@83.075,82.365 85.692,82.365 87.528,84.201 92.354,84.201 92.913,83.642 94.717,83.642 94.844,83.515 94.844,82.118 94.234,81.509 94.234,69.651 96.88,67.005 DD1.5@96.88,64.335
NetDA33_6: DA33.6 XS1.8 | length 27.7
  Top Layer w0.3: DA33.6@54.75,60.275 54.75,56.451 v1(54.762,56.439) ; XS1.8@75.525,51.575 v1(75.525,53.428)
  Bottom Layer w0.3: v1(54.762,56.439) 72.514,56.439 v1(75.525,53.428)
NetDA33_7: DA33.7 XS1.7 | length 29.6
  Top Layer w0.3: v1(53.48,53.365) DA33.7@53.48,60.275 ; XS1.7@74.525,51.575 v1(74.525,53.162)
  Bottom Layer w0.3: v1(53.48,53.365) 53.683,53.162 v1(74.525,53.162)
NetDA33_8: DA33.8 XS1.6 | length 29.8
  Top Layer w0.3: DA33.8@52.21,60.275 52.21,52.997 v1(52.502,52.705) ; XS1.6@73.525,51.575 v1(73.525,52.705)
  Bottom Layer w0.3: v1(52.502,52.705) v1(73.525,52.705)
NetDA33_9: DA33.9 XS1.5 | length 31.8
  Top Layer w0.3: v1(50.94,56.921) DA33.9@50.94,60.275 ; XS1.5@72.525,51.575 72.525,54.288 v1(74.041,55.804)
  Bottom Layer w0.3: v1(50.94,56.921) 50.944,56.925 72.92,56.925 v1(74.041,55.804)
NetDA33_14: DA33.14 R14.2 | length 64.2
  Top Layer w0.3: DA33.14@48.4,50.775 48.4,52.527 47.752,53.175 47.752,61.29 47.955,61.493 48.971,61.493 49.098,61.366 49.098,59.334 49.505,58.928 49.962,58.928 50.368,59.334 50.368,73.152 v1(51.486,74.27) ; v1(73.225,84.025) 73.075,84.175 73.075,87.944 73.825,88.694 73.825,89.1
  Bottom Layer w0.3: v1(51.486,74.27) 54.204,76.987 69.063,76.987 73.225,81.15 v1(73.225,84.025)
NetDA33_17: DA33.17 XS1.4 | length 25.2
  Top Layer w0.3: v1(51.791,52.693) 52.21,52.273 DA33.17@52.21,50.775 ; XS1.4@71.525,51.575 v1(71.525,54.294)
  Bottom Layer w0.3: v1(51.791,52.693) 53.392,54.294 v1(71.525,54.294)
NetDA33_18: DA33.18 XS1.3 | length 21.8
  Top Layer w0.3: DA33.18@53.48,50.775 53.48,51.918 v1(56.553,54.991) ; v1(66.751,54.991) 68.072,53.67 70.093,53.67 70.525,53.238 XS1.3@70.525,51.575
  Bottom Layer w0.3: v1(56.553,54.991) v1(66.751,54.991)
NetDA33_19: DA33.19 XS1.2 | length 18.5
  Top Layer w0.3: DA33.19@54.75,50.775 54.75,51.435 55.194,51.435 v1(55.474,51.714) ; v1(67.996,49.581) 67.996,49.428 69.088,49.428 69.525,49.865 XS1.2@69.525,51.575
  Bottom Layer w0.3: v1(55.474,51.714) 65.862,51.714 v1(67.996,49.581)
NetDA33_20: DA33.20 XS1.1 | length 17
  Top Layer w0.3: DA33.20@56.02,50.775 56.02,51.727 56.286,51.994 60.147,51.994 60.477,51.664 60.477,49.784 60.706,49.555 67.31,49.555 68.525,50.77 XS1.1@68.525,51.575
NetDD1_1: DD1.1
NetDD1_2: DD1.2 DD2.10 DD8.2 DD9.2 | length 90.8
  Top Layer w0.3: DD8.2@42.725,58.25 42.825,58.35 v1(42.825,59.575) ; v1(89.865,59.512) 90.05,59.697 90.05,61.715 ; DD9.2@90.05,62.35 90.05,61.715 ; v1(100.69,59.995) 100.69,61.9 ; DD1.2@100.69,64.335 100.69,61.9 ; v1(113.843,59.639) 113.843,51.613 114.531,50.925 DD2.10@116,50.925 ; 90.05,61.715 90.627,61.138 99.928,61.138 100.69,61.9
  Bottom Layer w0.3: v1(42.825,59.575) 70.723,59.575 70.907,59.391 89.744,59.391 v1(89.865,59.512) ; v1(100.69,59.995) 113.487,59.995 v1(113.843,59.639)
NetDD1_3: DD1.3 DD6.12 | length 13
  Top Layer w0.3: DD6.12@96.06,74.37 95.758,74.37 95.22,73.832 95.22,72.852 95.606,72.466 96.723,72.466 97,72.189 97,67.764 99.42,65.344 DD1.3@99.42,64.335
NetDD1_6: DD1.6 DD2.14 | length 24.6
  Top Layer w0.3: DD1.6@95.61,64.335 95.61,63.424 v1(96.596,62.438) ; v1(115.062,56.642) 115.062,56.286 115.343,56.005 DD2.14@116,56.005
  Bottom Layer w0.3: v1(96.596,62.438) 102.392,56.642 v1(115.062,56.642)
NetDD1_8: DD1.8 DD7.15 | length 21.5
  Top Layer w0.3: DD1.8@94.34,59.015 94.34,58.314 94.691,57.963 100.787,57.963 101.244,58.42 101.244,65.44 97.8,68.885 97.8,69.571 DD7.15@98.75,69.75
NetDD1_9: DD1.9 DD2.13 | length 25.3
  Top Layer w0.3: DD1.9@95.61,59.015 95.61,59.745 96.037,60.172 v1(99.594,60.172) ; v1(114.452,58.318) 114.452,55.27 114.988,54.735 DD2.13@116,54.735
  Bottom Layer w0.3: v1(99.594,60.172) 101.448,58.318 v1(114.452,58.318)
NetDD1_10: DD1.10 DD3.13 R19.1 SB1.2 | length 37.9
  Top Layer w0.3: v1(96.342,59.512) 96.545,59.309 96.88,59.309 DD1.10@96.88,59.015 ; R19.1@105.25,85.344 107.85,85.344 SB1.2@107.975,85.469 108.255,85.469 108.255,84.506 v1(107.925,84.176) ; v1@107.925,78.232 v1@107.925,78.283 ; v1@107.981,78.238 v1(107.944,78.238) 107.963,78.219 107.963,78.028 108.8,77.191 DD3.13@108.8,76.694
  Bottom Layer w0.3: v1(96.342,59.512) 96.342,60.782 96.139,60.985 96.139,62.992 100.457,67.31 101.932,67.31 107.944,73.322 v1(107.944,78.238) 107.925,78.257 v1(107.925,84.176)
NetDD2_1: DD2.1 DD5.15 | length 41.4
  Top Layer w0.3: DD5.15@68.825,62.05 68.825,61.325 v1(69.037,61.112) ; v1(94.056,56.718) 102.135,56.718 103.962,58.545 DD2.1@106.5,58.545
  Bottom Layer w0.3: v1(69.037,61.112) 70.175,59.975 70.888,59.975 71.073,59.791 73.082,59.791 73.439,60.147 90.627,60.147 v1(94.056,56.718)
NetDD2_4: DD2.4 R20.1 SB2.2 | length 36
  Top Layer w0.3: v1(79.985,55.829) 81.08,56.925 SB2.2@81.45,56.925 82.55,55.825 R20.1@82.55,51.95 ; v1(104.7,53.25) 104.7,53.932 105.503,54.735 DD2.4@106.5,54.735
  Bottom Layer w0.3: v1(79.985,55.829) 79.985,55.677 80.416,55.245 90.373,55.245 92.368,53.25 v1(104.7,53.25)